# EAGLE board LEDCube (EAGLE 7.2.0)
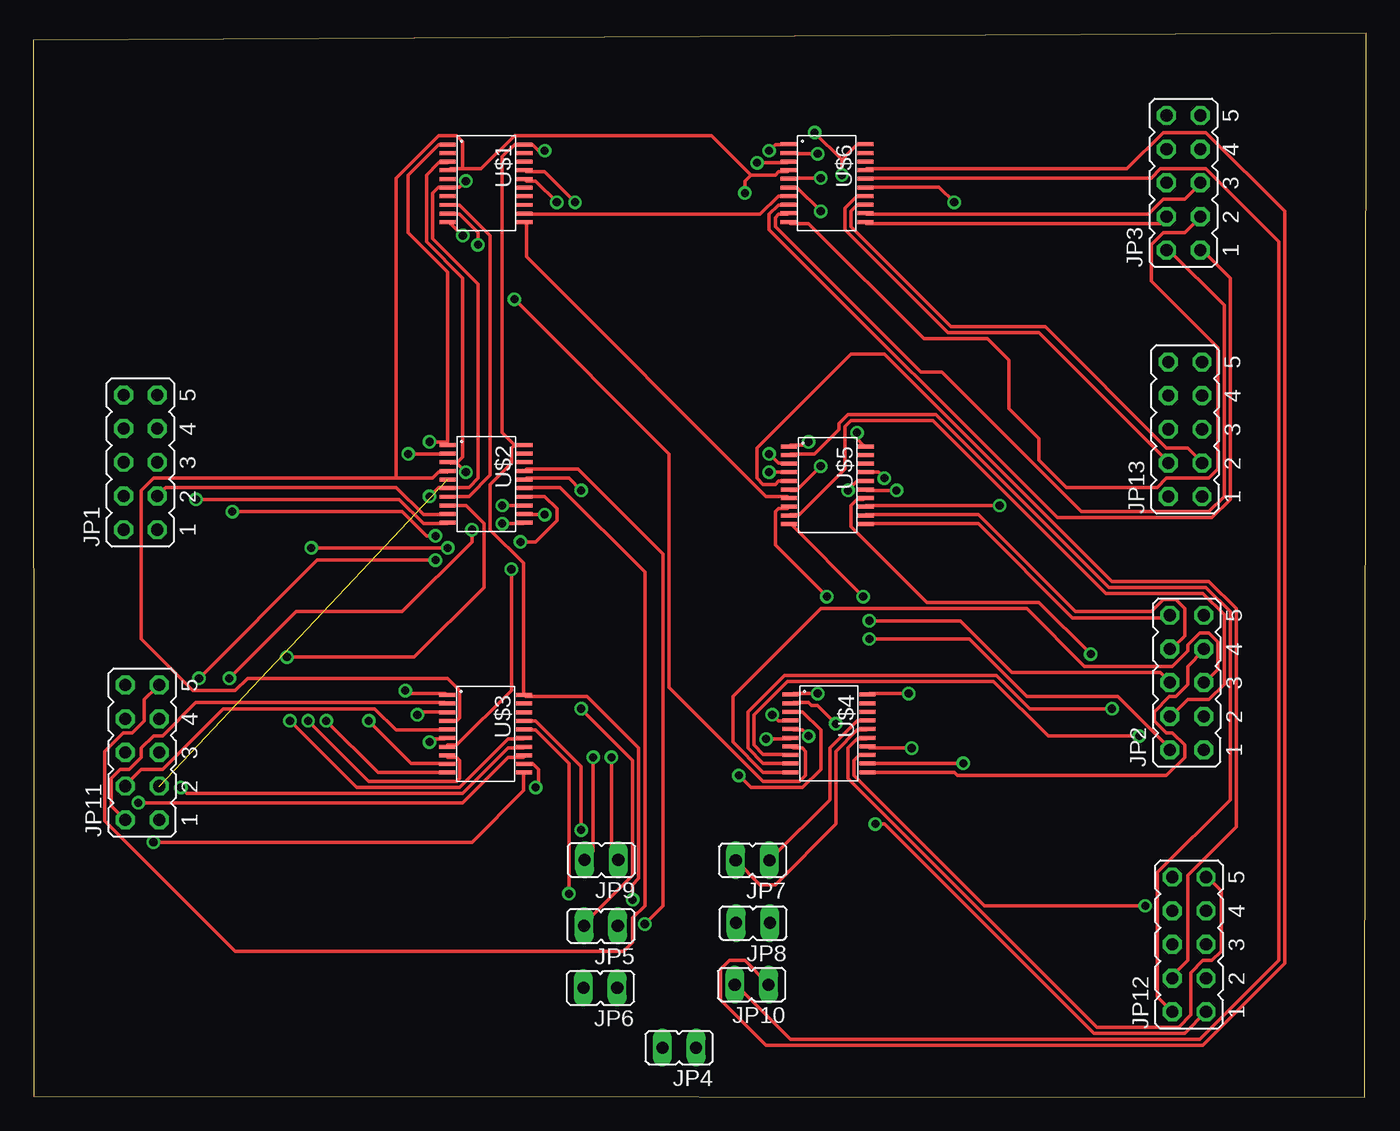
[diagram p0: board, top side]
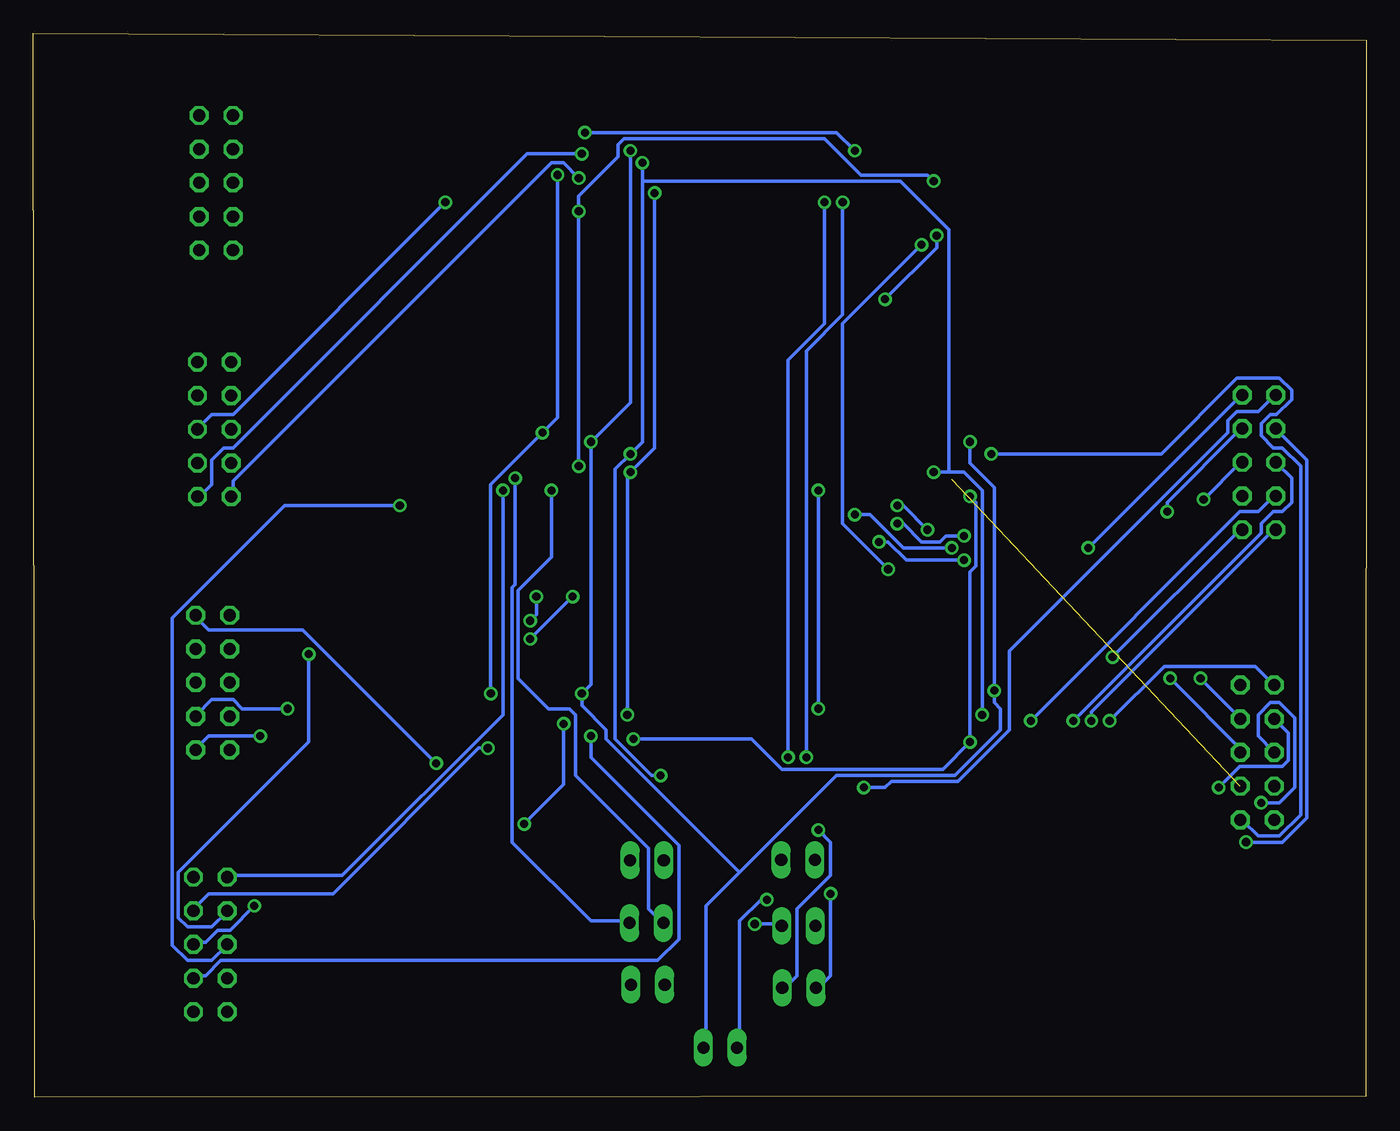
[diagram p1: board, bottom side, seen from below]

Size 100.48 x 80.22 mm. Coordinates in mm from the lower left corner, seen from the top.
Outline: 0.05,0.08 100.37,0 100.48,80.22 0,79.68 0.05,0.08
Copper layers (1*16): Top 0.035mm / dielectric 1.5mm / Bottom 0.035mm
Design rules "default": minimum track width 10mil, minimum drill 24mil, track to track 8mil, track to pad 8mil, pad to pad 8mil, via to via 8mil, smd to smd 8mil, copper to edge 40mil, drill to drill 8mil, minimum pad ring 10mil, minimum via ring 8mil, stop-mask expansion 4mil, vias tented up to drill 0mil, thermal gap 10mil

## Footprints (pad centres in the part's own frame; a part is rotated, then mirrored left to right if it is on the bottom)
JP5Q = drill 0.914 octagon: 1 -5.08,-1.27; 2 -5.08,1.27; 3 -2.54,-1.27; 4 -2.54,1.27; 5 0,-1.27; 6 0,1.27; 7 2.54,-1.27; 8 2.54,1.27; 9 5.08,-1.27; 10 5.08,1.27
JP1 = drill 0.914 long: 1 0,-1.27; 2 0,1.27
PW20 = smd 0.3 x 1.2: 1 -2.925,-2.9; 2 -2.275,-2.9; 3 -1.625,-2.9; 4 -0.975,-2.9; 5 -0.325,-2.9; 6 0.325,-2.9; 7 0.975,-2.9; 8 1.625,-2.9; 9 2.275,-2.9; 10 2.925,-2.9; 11 2.925,2.9; 12 2.275,2.9; 13 1.625,2.9; 14 0.975,2.9; 15 0.325,2.9; 16 -0.325,2.9; 17 -0.975,2.9; 18 -1.625,2.9; 19 -2.275,2.9; 20 -2.925,2.9

## Placement (x,y rotation side)
JP1  [JP5Q]  8.08,47.87 90 top
JP2  [JP5Q]  86.95,31.27 90 top
JP3  [JP5Q]  86.69,68.94 90 top
JP4  [JP1]  48.69,3.75 90 top
JP5  [JP1]  42.79,12.93 90 top
JP6  [JP1]  42.75,8.26 90 top
JP7  [JP1]  54.22,17.88 90 top
JP8  [JP1]  54.25,13.15 90 top
JP9  [JP1]  42.83,17.91 90 top
JP10  [JP1]  54.15,8.5 90 top
JP11  [JP5Q]  8.22,26 90 top
JP12  [JP5Q]  87.13,11.53 90 top
JP13  [JP5Q]  86.83,50.36 90 top
U$1  MSP430G2XX3TSSOP  [PW20]  34.14,68.9 270 top
U$2  MSP430G2XX3TSSOP  [PW20]  34.14,46.25 270 top
U$3  MSP430G2XX3TSSOP  [PW20]  34.1,27.41 270 top
U$4  MSP430G2XX3TSSOP  [PW20]  59.98,27.44 270 top
U$5  MSP430G2XX3TSSOP  [PW20]  59.88,46.15 270 top
U$6  MSP430G2XX3TSSOP  [PW20]  59.82,68.91 270 top

## Library data of the parts
JP1-JP13 = jumper
U$1-U$6 = ELEC327

## Nets
0A0: JP1.1 U$2.8
0A1: JP1.3 U$2.9
0A2: JP1.5 U$2.10
0A3: JP1.7 U$2.11
0A4: JP1.9 U$2.12
0C0: JP11.1 U$2.2
0C1: JP11.3 U$2.5
0C2: JP11.5 U$2.13
0C3: JP11.7 U$2.14
0C4: JP11.9 U$2.15
1A0: JP1.2 U$3.8
1A1: JP1.4 U$3.9
1A2: JP1.6 U$3.10
1A3: JP1.8 U$3.11
1A4: JP1.10 U$3.12
1C0: JP11.2 U$3.2
1C1: JP11.4 U$3.5
1C2: JP11.6 U$3.13
1C3: JP11.8 U$3.14
1C4: JP11.10 U$3.15
2A0: JP2.1 U$4.8
2A1: JP2.3 U$4.9
2A2: JP2.5 U$4.10
2A3: JP2.7 U$4.11
2A4: JP2.9 U$4.12
2C0: JP12.1 U$4.2
2C1: JP12.3 U$4.5
2C2: JP12.5 U$4.13
2C3: JP12.7 U$4.14
2C4: JP12.9 U$4.15
3A0: JP2.2 U$5.8
3A1: JP2.4 U$5.9
3A2: JP2.6 U$5.10
3A3: JP2.8 U$5.12
3A4: JP2.10 U$5.11
3C0: JP12.2 U$5.2
3C1: JP12.4 U$5.5
3C2: JP12.6 U$5.13
3C3: JP12.8 U$5.14
3C4: JP12.10 U$5.15
4A0: JP3.1 U$6.8
4A1: JP3.2 U$6.9
4A2: JP3.3 U$6.10
4A3: JP3.4 U$6.11
4A4: JP3.5 U$6.12
4C0: JP13.1 U$6.2
4C1: JP13.2 U$6.5
4C2: JP13.3 U$6.13
4C3: JP13.4 U$6.14
4C4: JP13.5 U$6.15
GND: JP4.2 U$1.20 U$2.20 U$3.20 U$4.20 U$5.20 U$6.20
RST0: JP5.2 U$2.16
RST1: JP6.2 U$3.16
RST2: JP7.2 U$4.16
RST3: JP8.2 U$5.16
RST4: JP10.2 U$6.16
RSTM: JP9.2 U$1.16
SIMO: U$1.4 U$2.4 U$3.4 U$4.4 U$5.4 U$6.4
SOMI: U$1.3 U$2.3 U$3.3 U$4.3 U$5.3 U$6.3
STE0: U$1.8 U$2.7
STE1: U$1.9 U$3.7
STE2: U$1.10 U$4.7
STE3: U$1.11 U$5.7
STE4: U$1.12 U$6.7
TST0: JP5.1 U$2.17
TST1: JP6.1 U$3.17
TST2: JP7.1 U$4.17
TST3: JP8.1 U$5.17
TST4: JP10.1 U$6.17
TSTM: JP9.1 U$1.17
UCA0CLK: U$1.6 U$2.6 U$3.6 U$4.6 U$5.6 U$6.6
VCC: JP4.1 U$1.1 U$2.1 U$3.1 U$4.1 U$5.1 U$6.1

## Tracks (layer width: path | path; a pad name or v marks a point on that pad's centre or on a via)
0A0  (via drill 0.61)
  Top 0.254: v19.12,33.19 28.72,33.19 33.98,38.44 33.98,43.24 32.61,44.62 31.47,44.62 U$2.8
  Bottom 0.254: v19.12,33.19 9.52,42.79 JP1.1
0A1
  Top 0.254: U$2.9 31.24,43.93 29.41,43.93 27.35,45.99 9.98,45.99 9.52,45.53 JP1.3
0A2  (via drill 0.61)
  Top 0.254: v12.27,45.07 27.58,45.07 29.41,43.24 31.24,43.24 U$2.10
  Bottom 0.254: v12.27,45.07 9.52,47.82 JP1.5
0A3  (via drill 0.61)
  Top 0.254: v35.35,43.24 36.95,43.24 U$2.11 | v30.32,42.33 29.64,42.33 27.81,44.16 v15.01,44.16
  Bottom 0.254: v35.35,43.24 34.9,43.24 33.53,41.87 32.15,41.87 31.7,42.33 v30.32,42.33 | v15.01,44.16 15.01,44.84 9.52,50.33 JP1.7
0A4  (via drill 0.61)
  Top 0.254: v38.55,43.93 37.18,43.93 U$2.12 | v20.95,41.41 v31.24,41.41
  Bottom 0.254: v38.55,43.93 37.41,43.93 34.9,41.41 v31.24,41.41 | v20.95,41.41 9.52,52.84 JP1.9
0C0  (via drill 0.61)
  Top 0.254: v28.27,48.5 31.24,48.5 U$2.2
  Bottom 0.254: v28.27,48.5 15.47,48.5 9.75,54.22 6.55,54.22 5.64,53.3 5.64,52.62 6.78,51.47 7.24,51.47 7.92,50.79 7.92,49.87 7.01,48.96 6.32,48.96 4.95,47.59 4.95,21.3 6.55,19.7 8.15,19.7 9.29,20.84 JP11.1
0C1  (1 unrouted)
0C2  (via drill 0.61)
  Top 0.254: v35.35,44.62 36.95,44.62 U$2.13 | v33.07,42.79 33.07,41.87 27.81,36.62 19.81,36.62 v14.78,31.58
  Bottom 0.254: v35.35,44.62 34.9,44.62 v33.07,42.79 | v14.78,31.58 9.29,26.1 JP11.5
0C3  (via drill 0.61)
  Top 0.254: v36.73,41.87 37.87,41.87 39.47,43.47 39.47,44.39 38.55,45.3 37.18,45.3 U$2.14 | v30.32,40.5 21.41,40.5 v12.49,31.58
  Bottom 0.254: v36.73,41.87 36.04,41.87 34.67,40.5 v30.32,40.5 | v12.49,31.58 9.52,28.61 JP11.7
0C4
  Top 0.254: U$2.15 37.18,45.99 39.7,45.99 46.1,39.59 46.1,14.44 45.18,13.53 45.18,11.7 44.5,11.01 15.24,11.01 5.41,20.84 5.41,26.1 6.78,27.47 7.47,27.47 8.38,28.38 8.38,29.98 9.29,30.9 JP11.9
1A0  (via drill 0.61)
  Top 0.254: v20.72,28.38 25.3,23.81 31.92,23.81 32.15,24.04 32.15,25.41 31.92,25.64 31.24,25.64 U$3.8
  Bottom 0.254: v20.72,28.38 20.72,29.07 7.01,42.79 JP1.2
1A1  (via drill 0.61)
  Top 0.254: v25.3,28.38 28.5,25.18 31.01,25.18 U$3.9
  Bottom 0.254: v25.3,28.38 9.52,44.16 8.15,44.16 7.01,45.3 JP1.4
1A2  (via drill 0.61)
  Top 0.254: v22.1,28.38 25.98,24.5 31.01,24.5 U$3.10
  Bottom 0.254: v22.1,28.38 7.92,42.56 7.92,43.24 7.01,44.16 6.32,44.16 5.64,44.84 5.64,46.67 6.78,47.82 JP1.6
1A3  (via drill 0.61)
  Top 0.254: v9.06,19.24 33.07,19.24 36.95,23.13 36.95,24.5 U$3.11
  Bottom 0.254: v9.06,19.24 6.32,19.24 4.49,21.07 4.49,48.05 6.78,50.33 JP1.8
1A4  (via drill 0.61)
  Top 0.254: v37.87,23.36 38.1,23.58 38.1,24.73 37.64,25.18 37.18,25.18 U$3.12
  Bottom 0.254: v37.87,23.36 36.27,23.36 35.81,23.81 30.78,23.81 26.9,27.7 26.9,33.64 10.44,50.1 10.44,51.02 9.75,51.7 8.15,51.7 7.01,52.84 JP1.10
1C0
  Top 0.254: U$3.2 31.01,29.76 12.27,29.76 9.75,27.24 9.06,27.24 8.15,26.33 8.15,25.64 7.24,24.73 6.55,24.73 5.87,24.04 5.87,21.98 6.78,21.07 JP11.2
1C1
  Top 0.254: U$3.5 31.01,27.7 27.35,27.7 25.75,29.3 14.32,29.3 9.75,24.73 8.15,24.73 7.01,23.58 JP11.4
1C2  (via drill 0.61)
  Top 0.254: v7.92,22.21 32.38,22.21 35.81,25.64 36.95,25.64 U$3.13
  Bottom 0.254: v7.92,22.21 6.55,22.21 5.41,23.36 5.41,28.61 6.55,29.76 7.24,29.76 8.15,28.84 8.15,27.24 7.01,26.1 JP11.6
1C3  (via drill 0.61)
  Top 0.254: v11.12,23.36 11.58,22.9 32.38,22.9 35.81,26.33 36.95,26.33 U$3.14
  Bottom 0.254: v11.12,23.36 9.52,24.96 6.32,24.96 5.87,25.41 5.87,27.47 6.78,28.38 JP11.8
1C4  (via drill 0.61)
  Top 0.254: v19.35,28.38 24.38,23.36 32.15,23.36 35.81,27.01 36.95,27.01 U$3.15
  Bottom 0.254: v19.35,28.38 15.24,32.5 8.38,32.5 7.01,31.13 JP11.10
2A0  (via drill 0.61)
  Top 0.254: v83.36,27.24 76.5,27.24 72.39,31.36 56.84,31.36 54.33,28.84 54.33,26.56 55.01,25.87 57.07,25.87 U$4.8
  Bottom 0.254: v83.36,27.24 87.25,27.24 88.16,26.33 JP2.1
2A1  (via drill 0.61)
  Top 0.254: v81.3,29.3 75.13,29.3 72.62,31.81 56.61,31.81 53.87,29.07 53.87,26.33 55.01,25.18 57.07,25.18 U$4.9
  Bottom 0.254: v81.3,29.3 84.73,29.3 85.42,29.98 87.02,29.98 88.16,28.84 JP2.3
2A2
  Top 0.254: U$4.10 57.07,24.5 55.01,24.5 52.73,26.79 52.73,30.21 59.36,36.84 74.9,36.84 79.25,32.5 85.88,32.5 87.02,33.64 87.02,34.1 87.93,35.01 88.62,35.01 89.3,34.33 89.3,32.27 88.39,31.36 JP2.5
2A3
  Top 0.254: U$4.11 63.02,24.5 69.42,24.5 69.64,24.27 85.42,24.27 86.79,25.64 86.79,26.56 85.88,27.47 85.42,27.47 84.5,28.38 84.5,29.07 85.65,30.21 86.1,30.21 87.02,31.13 87.02,32.5 88.16,33.64 JP2.7
2A4  (via drill 0.61)
  Top 0.254: v70.1,25.18 63.02,25.18 U$4.12
  Bottom 0.254: v70.1,25.18 80.16,35.24 87.25,35.24 88.16,36.16 JP2.9
2C0  (via drill 0.61)
  Top 0.254: v60.5,28.16 59.13,29.53 58.67,29.53 58.44,29.76 57.3,29.76 U$4.2 | v63.47,20.61 64.16,20.61 79.93,4.84 86.79,4.84 88.39,6.44 JP12.1
  Bottom 0.254: v60.5,28.16 60.5,23.58 v63.47,20.61
2C1  (via drill 0.61)
  Top 0.254: v58.44,27.24 57.99,27.7 57.3,27.7 U$4.5
  Bottom 0.254: v58.44,27.24 58.44,25.64 51.81,19.01 51.81,11.93 53.41,10.33 86.33,10.33 87.48,9.18 88.39,9.18 JP12.3
2C2  (via drill 0.61)
  Top 0.254: v83.82,14.44 71.7,14.44 61.87,24.27 61.87,25.41 62.33,25.87 62.79,25.87 U$4.13
  Bottom 0.254: v83.82,14.44 85.65,12.61 86.56,12.61 87.48,11.7 88.39,11.7 JP12.5
2C3  (via drill 0.61)
  Top 0.254: v66.22,26.33 63.02,26.33 U$4.14
  Bottom 0.254: v66.22,26.33 66.9,26.33 77.87,15.36 87.25,15.36 88.39,14.21 JP12.7
2C4
  Top 0.254: U$4.15 62.79,27.01 62.1,27.01 61.41,26.33 61.41,24.04 80.16,5.3 86.33,5.3 87.25,6.21 87.25,9.41 88.16,10.33 88.85,10.33 89.53,11.01 89.53,15.58 88.62,16.5 JP12.9
3A0  (via drill 0.61)
  Top 0.254: v59.81,37.76 55.93,41.64 55.93,44.16 56.16,44.39 56.84,44.39 U$5.8 | v63.02,34.56 70.56,34.56 74.9,30.21 81.76,30.21 85.65,26.33 JP2.2
  Bottom 0.254: v63.02,34.56 v59.81,37.76
3A1
  Top 0.254: U$5.9 57.07,43.93 57.76,43.93 61.19,47.36 61.19,50.56 61.64,51.02 67.82,51.02 80.85,37.99 88.16,37.99 89.76,36.39 89.76,31.13 88.62,29.98 87.02,29.98 85.88,28.84 JP2.4
3A2  (via drill 0.61)
  Top 0.254: v62.56,37.76 57.07,43.24 U$5.10 | v63.02,35.93 69.87,35.93 73.76,32.04 84.96,32.04 85.65,31.36 JP2.6
  Bottom 0.254: v62.56,37.76 62.56,36.39 v63.02,35.93
3A3
  Top 0.254: U$5.12 62.79,43.93 71.25,43.93 78.56,36.62 84.28,36.62 85.19,37.53 86.1,37.53 86.79,36.84 86.79,34.79 85.88,33.87 JP2.8
3A4
  Top 0.254: U$5.11 62.79,43.24 71.25,43.24 78.33,36.16 85.65,36.16 JP2.10
3C0
  Top 0.254: U$5.2 57.07,48.5 58.9,48.5 60.73,50.33 60.73,50.79 61.41,51.47 68.04,51.47 81.07,38.44 88.39,38.44 90.22,36.62 90.22,22.44 84.73,16.95 84.73,7.58 85.65,6.67 JP12.2
3C1
  Top 0.254: U$5.5 56.84,46.44 56.16,46.44 55.93,46.22 55.01,46.22 54.56,46.67 54.56,48.96 61.64,56.05 64.16,56.05 81.3,38.9 88.62,38.9 90.68,36.84 90.68,20.38 87.02,16.73 87.02,10.33 85.88,9.18 JP12.4
3C2  (via drill 0.61)
  Top 0.254: v72.84,44.62 62.79,44.62 U$5.13
  Bottom 0.254: v72.84,44.62 81.53,44.62 89.99,36.16 89.99,11.47 88.85,10.33 87.02,10.33 85.88,11.47 JP12.6
3C3  (via drill 0.61)
  Top 0.254: v79.7,33.41 75.82,37.3 67.36,37.3 61.64,43.02 61.64,44.62 62.1,45.07 62.56,45.07 U$5.14
  Bottom 0.254: v79.7,33.41 79.7,26.79 89.53,16.95 89.53,13.53 88.85,12.84 87.02,12.84 85.88,13.98 JP12.8
3C4  (via drill 0.61)
  Top 0.254: v65.07,45.76 62.79,45.76 U$5.15
  Bottom 0.254: v65.07,45.76 65.07,28.84 77.19,16.73 85.65,16.73 JP12.10
4A0
  Top 0.254: U$6.8 56.84,67.25 56.16,67.25 55.47,66.56 55.47,65.42 77.19,43.7 88.85,43.7 90.22,45.07 90.22,61.76 88.16,63.82 JP3.1
4A1
  Top 0.254: U$6.9 56.84,66.56 56.16,66.56 55.93,66.33 55.93,65.65 66.9,54.67 68.5,54.67 79.02,44.16 88.62,44.16 89.76,45.3 89.76,59.7 85.65,63.82 JP3.2
4A2
  Top 0.254: U$6.10 57.07,65.88 58.44,65.88 67.13,57.19 71.93,57.19 73.53,55.59 73.53,51.93 75.82,49.65 75.82,48.05 77.87,45.99 84.73,45.99 85.42,46.67 88.62,46.67 89.3,47.36 89.3,56.5 84.28,61.53 84.28,64.28 85.19,65.19 86.79,65.19 87.93,66.33 JP3.3
4A3
  Top 0.254: U$6.11 62.79,65.88 84.96,65.88 85.42,66.33 JP3.4
4A4
  Top 0.254: U$6.12 62.79,66.56 84.05,66.56 85.19,67.7 86.79,67.7 87.93,68.85 JP3.5
4C0  (via drill 0.61)
  Top 0.254: v59.13,71.13 57.07,71.13 U$6.2
  Bottom 0.254: v59.13,71.13 63.24,71.13 85.42,48.96 86.1,48.96 87.02,48.05 87.02,46.22 87.93,45.3 JP13.1
4C1  (via drill 0.61)
  Top 0.254: v59.36,69.3 57.07,69.3 U$6.5
  Bottom 0.254: v59.36,69.3 60.5,70.45 61.41,70.45 85.42,46.44 85.42,45.3 JP13.2
4C2
  Top 0.254: U$6.13 62.56,67.25 62.1,67.25 61.64,66.79 61.64,65.65 69.19,58.1 76.27,58.1 85.42,48.96 87.02,48.96 87.93,48.05 JP13.3
4C3
  Top 0.254: U$6.14 62.56,67.93 62.1,67.93 61.19,67.02 61.19,65.42 68.96,57.65 75.82,57.65 85.42,48.05 JP13.4
4C4  (via drill 0.61)
  Top 0.254: v69.42,67.48 68.27,68.62 62.79,68.62 U$6.15
  Bottom 0.254: v69.42,67.48 85.42,51.47 87.02,51.47 87.93,50.56 JP13.5
GND  (via drill 0.61)
  Top 0.254: 60.96,70.68 62.1,71.82 62.56,71.82 U$6.20 | v60.96,69.53 60.96,70.68 | v62.1,50.1 62.1,49.65 62.56,49.19 U$5.20 | v65.99,30.44 63.02,30.44 U$4.20 | 36.27,49.19 36.04,48.96 36.04,47.82 34.44,46.22 34.44,42.79 36.95,40.27 36.95,30.44 U$3.20 37.18,30.21 41.75,30.21 45.64,26.33 45.64,16.5 45.18,16.04 v45.18,14.9 | 36.27,49.19 36.95,49.19 U$2.20 | 36.27,49.19 35.35,50.1 35.35,70.91 36.27,71.82 36.95,71.82 U$1.20 37.18,71.82 37.64,71.82 38.1,71.36 v38.55,71.36 | v58.9,72.73 60.96,70.68
  Bottom 0.254: v60.96,69.53 60.96,51.25 v62.1,50.1 65.99,46.22 v65.99,30.44 | v45.18,14.9 45.64,14.9 47.24,13.3 47.24,3.93 JP4.2 | v58.9,72.73 39.93,72.73 v38.55,71.36
RST0  (via drill 0.61)
  Top 0.254: v41.3,45.76 40.38,46.67 37.18,46.67 U$2.16 | v41.3,29.3 45.18,25.41 45.18,16.73 41.53,13.07 JP5.2
  Bottom 0.254: v41.3,29.3 v41.3,45.76
RST1  (via drill 0.61)
  Top 0.254: v40.38,15.36 40.38,25.18 37.87,27.7 37.18,27.7 U$3.16
  Bottom 0.254: v40.38,15.36 40.38,9.18 41.3,8.27 JP6.2
RST2
  Top 0.254: U$4.16 62.79,27.7 62.1,27.7 60.5,26.1 60.5,20.61 55.93,16.04 54.78,16.04 JP7.2
RST3  (via drill 0.61)
  Top 0.254: v61.41,45.76 62.1,46.44 62.56,46.44 U$5.16
  Bottom 0.254: v61.41,45.76 61.41,40.73 63.93,38.22 63.93,31.58 61.64,29.3 60.04,29.3 59.59,28.84 59.59,24.27 54.1,18.78 54.1,14.21 53.18,13.3 JP8.2
RST4
  Top 0.254: U$6.16 62.79,69.3 84.28,69.3 84.96,69.99 88.39,69.99 93.88,64.5 93.88,10.33 87.93,4.38 57.07,4.38 52.96,8.5 JP10.2
RSTM  (via drill 0.61)
  Top 0.254: v39.47,67.48 37.87,69.08 37.18,69.08 U$1.16 | v42.21,25.64 42.21,18.55 41.75,18.1 JP9.2
  Bottom 0.254: v39.47,67.48 39.47,59.02 42.21,56.27 v42.21,25.64
SIMO  (via drill 0.61)
  Top 0.254: U$3.4 31.92,28.38 32.15,28.61 32.15,30.67 31.24,31.58 16.15,31.58 15.24,30.67 12.04,30.67 8.15,34.56 8.15,45.76 9.06,46.67 27.35,46.67 | 27.35,46.67 30.1,46.67 30.55,47.13 31.24,47.13 U$2.4 | v55.7,28.84 56.16,28.38 57.07,28.38 U$4.4 | v55.47,47.13 56.84,47.13 U$5.4 | 32.38,69.99 33.75,69.99 36.27,72.5 51.13,72.5 54.1,69.53 | 32.38,69.99 31.47,69.99 U$1.4 | 54.1,69.53 55.93,69.53 56.16,69.76 56.84,69.76 U$6.4 | v53.64,68.16 53.64,69.08 54.1,69.53 | 27.35,46.67 27.35,69.3 30.55,72.5 31.92,72.5 32.38,72.05 32.38,69.99
  Bottom 0.254: v55.7,28.84 55.7,46.9 v55.47,47.13 53.64,48.96 v53.64,68.16
SOMI  (via drill 0.61)
  Top 0.254: v28.95,28.84 29.18,29.07 31.01,29.07 U$3.3 | 31.92,47.82 v32.61,47.13 | 31.92,47.82 31.47,47.82 U$2.3 | 31.92,47.82 32.38,48.27 32.38,61.76 29.64,64.5 29.64,69.53 30.55,70.45 31.24,70.45 U$1.3 | v53.18,24.27 54.1,23.36 57.99,23.36 59.36,24.73 59.36,27.7 57.99,29.07 57.3,29.07 U$4.3 | v55.47,48.5 56.16,47.82 56.84,47.82 U$5.3 | v54.56,70.45 56.84,70.45 U$6.3
  Bottom 0.254: v28.95,28.84 28.95,45.76 30.32,47.13 31.47,47.13 | v32.61,47.13 31.47,47.13 | v53.18,24.27 53.87,24.27 56.61,27.01 56.61,47.36 v55.47,48.5 54.56,49.42 54.56,69.08 | 54.56,69.08 v54.56,70.45 | 31.47,47.13 31.47,65.42 35.13,69.08 54.56,69.08
STE0
  Top 0.254: U$2.7 31.47,45.3 32.84,45.3 34.44,46.9 34.44,64.96 32.15,67.25 31.47,67.25 U$1.8
STE1  (via drill 0.61)
  Top 0.254: v36.04,39.82 36.04,30.67 31.92,26.56 31.24,26.56 U$3.7 | v33.53,64.28 33.53,65.19 32.15,66.56 31.47,66.56 U$1.9
  Bottom 0.254: v36.04,39.82 39.47,43.24 39.47,58.33 v33.53,64.28
STE2  (via drill 0.61)
  Top 0.254: v36.27,60.16 47.93,48.5 47.93,30.9 55.01,23.81 57.76,23.81 58.21,24.27 58.21,26.1 57.99,26.33 57.3,26.33 U$4.7 | v32.38,64.96 31.47,65.88 U$1.10
  Bottom 0.254: v36.27,60.16 32.38,64.05 v32.38,64.96
STE3
  Top 0.254: U$5.7 56.84,45.3 55.24,45.3 37.18,63.36 37.18,65.88 U$1.11
STE4
  Top 0.254: U$1.12 37.18,66.56 54.78,66.56 56.16,67.93 56.84,67.93 U$6.7
TST0  (via drill 0.61)
  Top 0.254: v46.1,13.07 47.47,14.44 47.47,40.96 41.07,47.36 37.18,47.36 U$2.17
  Bottom 0.254: v46.1,13.07 44.27,13.07 JP5.1
TST1  (via drill 0.61)
  Top 0.254: U$3.17 37.87,28.38 41.3,24.96 v41.3,20.15
  Bottom 0.254: v41.3,20.15 40.38,19.24 40.38,16.73 42.9,14.21 42.9,9.18 43.81,8.27 JP6.1
TST2
  Top 0.254: U$4.17 62.79,28.38 62.1,28.38 60.04,26.33 60.04,22.44 55.7,18.1 JP7.1
TST3  (via drill 0.61)
  Top 0.254: v64.16,46.67 63.7,47.13 U$5.17
  Bottom 0.254: v64.16,46.67 64.16,38.67 64.39,38.44 64.39,19.24 58.44,13.3 55.7,13.3 JP8.1
TST4
  Top 0.254: U$6.17 62.79,69.99 82.45,69.99 85.19,72.73 88.39,72.73 94.33,66.79 94.33,10.1 88.16,3.93 55.24,3.93 51.81,7.35 51.81,9.64 52.5,10.33 53.64,10.33 55.24,8.72 JP10.1
TSTM  (via drill 0.61)
  Top 0.254: v40.84,67.48 38.55,69.76 37.18,69.76 U$1.17 | v43.58,25.64 43.58,18.55 44.04,18.1 JP9.1
  Bottom 0.254: v40.84,67.48 40.84,58.33 43.58,55.59 v43.58,25.64
UCA0CLK  (via drill 0.61)
  Top 0.254: v59.36,47.59 57.53,45.76 57.07,45.76 U$5.6 | v59.36,66.79 57.53,68.62 57.07,68.62 U$6.6 | v29.87,26.79 30.1,27.01 31.01,27.01 U$3.6 | v29.87,45.3 30.55,45.99 31.24,45.99 U$2.6 31.47,45.99 32.84,45.99 33.53,46.67 33.53,61.3 30.1,64.73 30.1,68.16 30.55,68.62 31.24,68.62 U$1.6 31.47,68.62 32.15,68.62 v32.61,69.08 | v55.24,27.01 57.07,27.01 U$4.6
  Bottom 0.254: v59.36,47.59 v59.36,66.79 59.36,67.93 56.39,70.91 56.39,71.82 55.93,72.28 40.84,72.28 38.1,69.53 33.07,69.53 v32.61,69.08 | v29.87,45.3 29.41,44.84 29.41,40.04 29.87,39.59 v29.87,26.79 31.92,24.73 44.04,24.73 46.33,27.01 v55.24,27.01
VCC  (via drill 0.61)
  Top 0.254: 31.24,49.42 31.24,62.22 28.27,65.19 28.27,69.53 30.55,71.82 U$1.1 | 31.24,49.42 31.24,49.19 U$2.1 | v28.04,30.67 28.27,30.44 31.01,30.44 U$3.1 | v59.13,30.44 57.3,30.44 U$4.1 | v58.44,49.42 58.21,49.19 57.07,49.19 U$5.1 | v55.47,71.36 55.93,71.82 56.84,71.82 U$6.1 | v29.87,49.42 31.24,49.42
  Bottom 0.254: 47.24,16.95 49.76,14.44 49.76,3.93 JP4.1 | 47.24,16.95 39.93,24.27 31.01,24.27 27.58,27.7 27.58,29.3 28.04,29.76 v28.04,30.67 28.04,45.99 29.87,47.82 v29.87,49.42 | 47.24,16.95 57.3,27.01 57.3,27.7 59.13,29.53 v59.13,30.44 58.44,31.13 v58.44,49.42 55.47,52.39 v55.47,71.36